# EAGLE board Qwiic Mux-Panel_v10-Panel (EAGLE 7.7.0), part 1 of 3
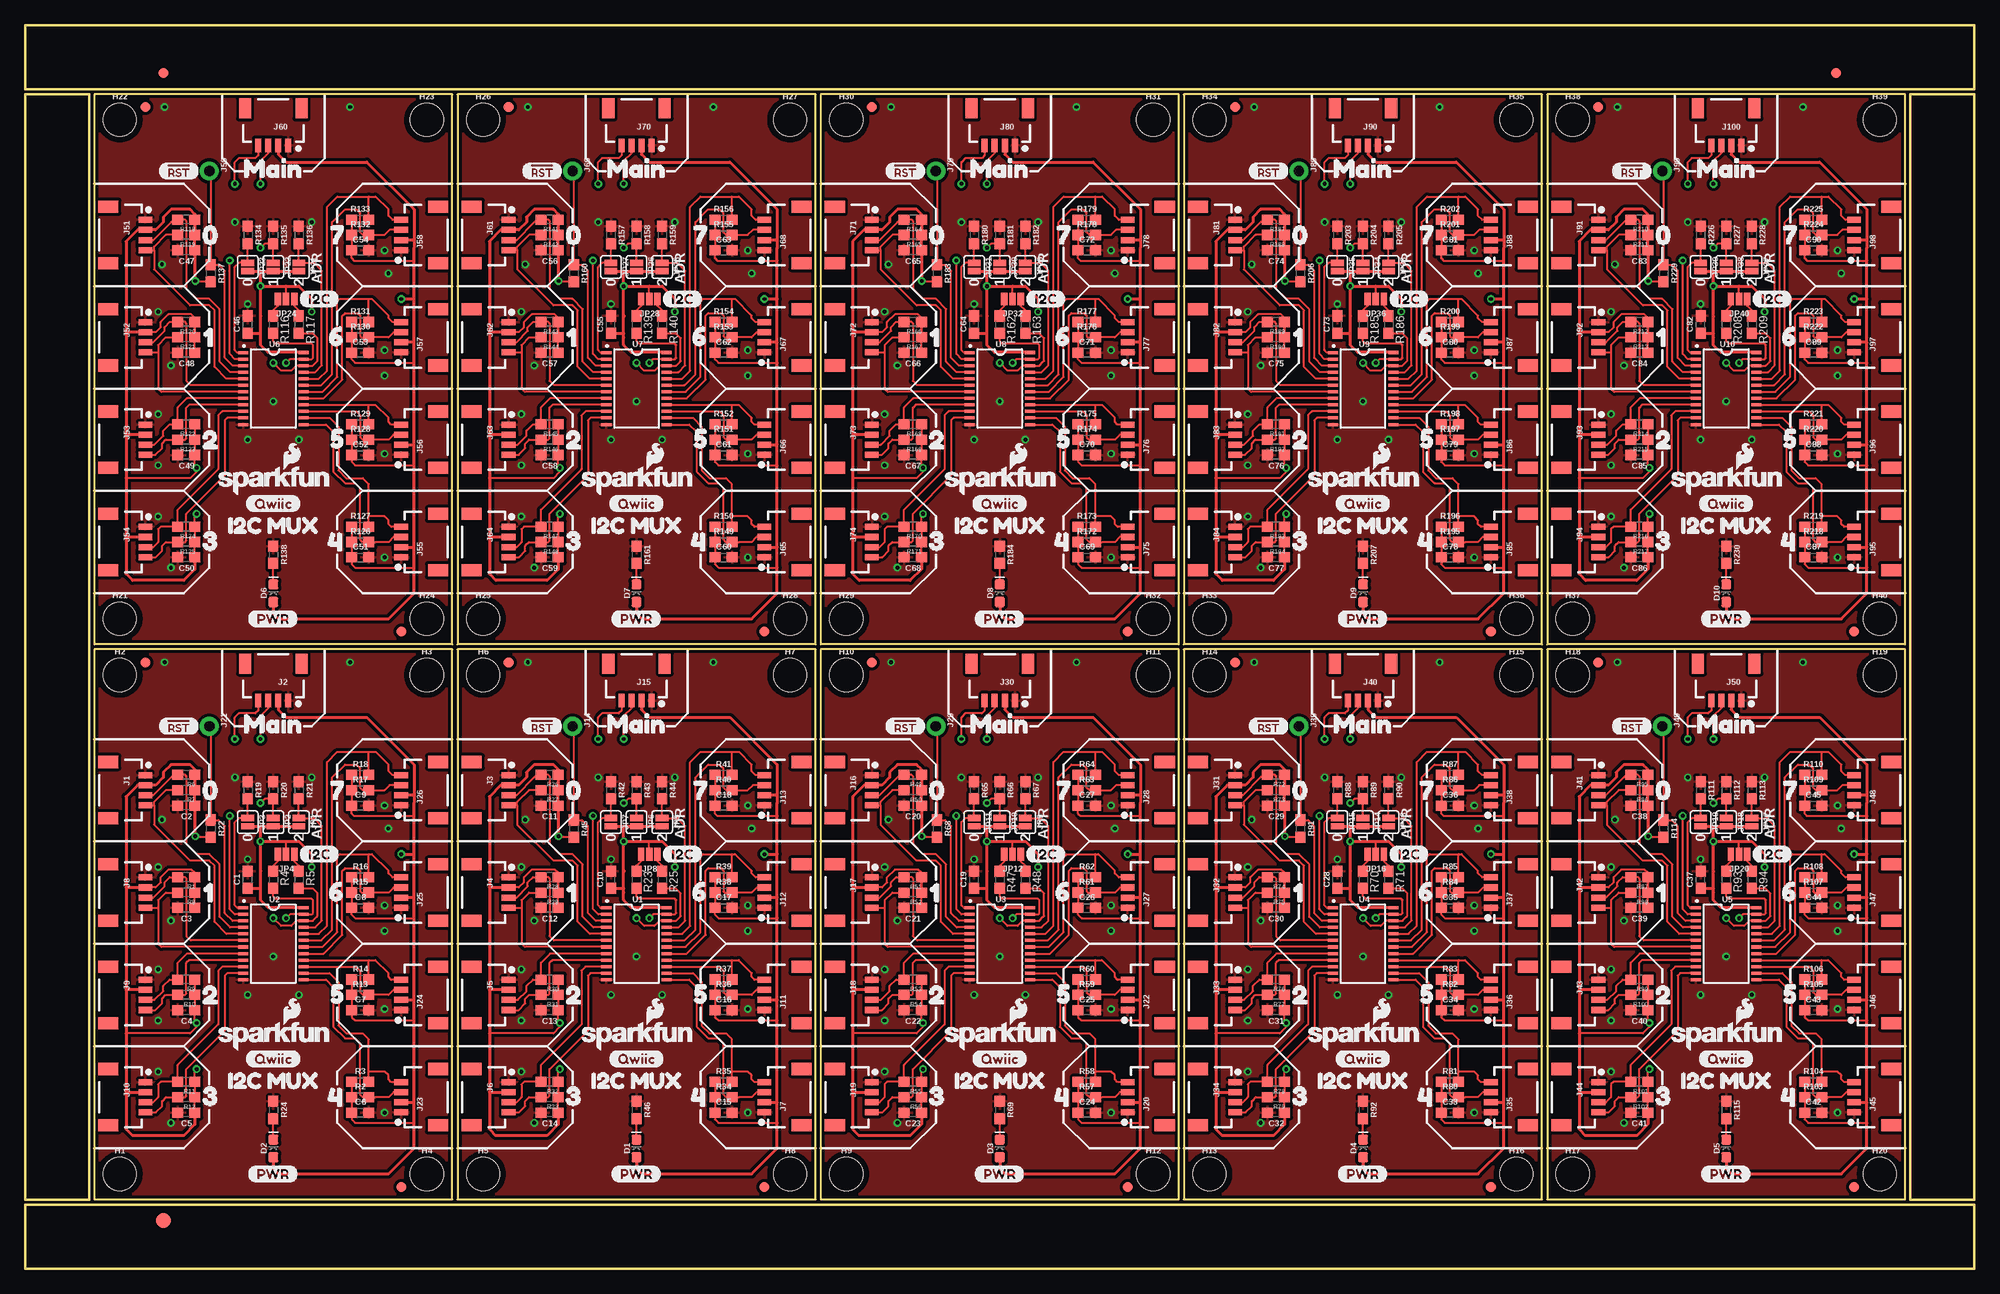
[diagram p0: board, top side]
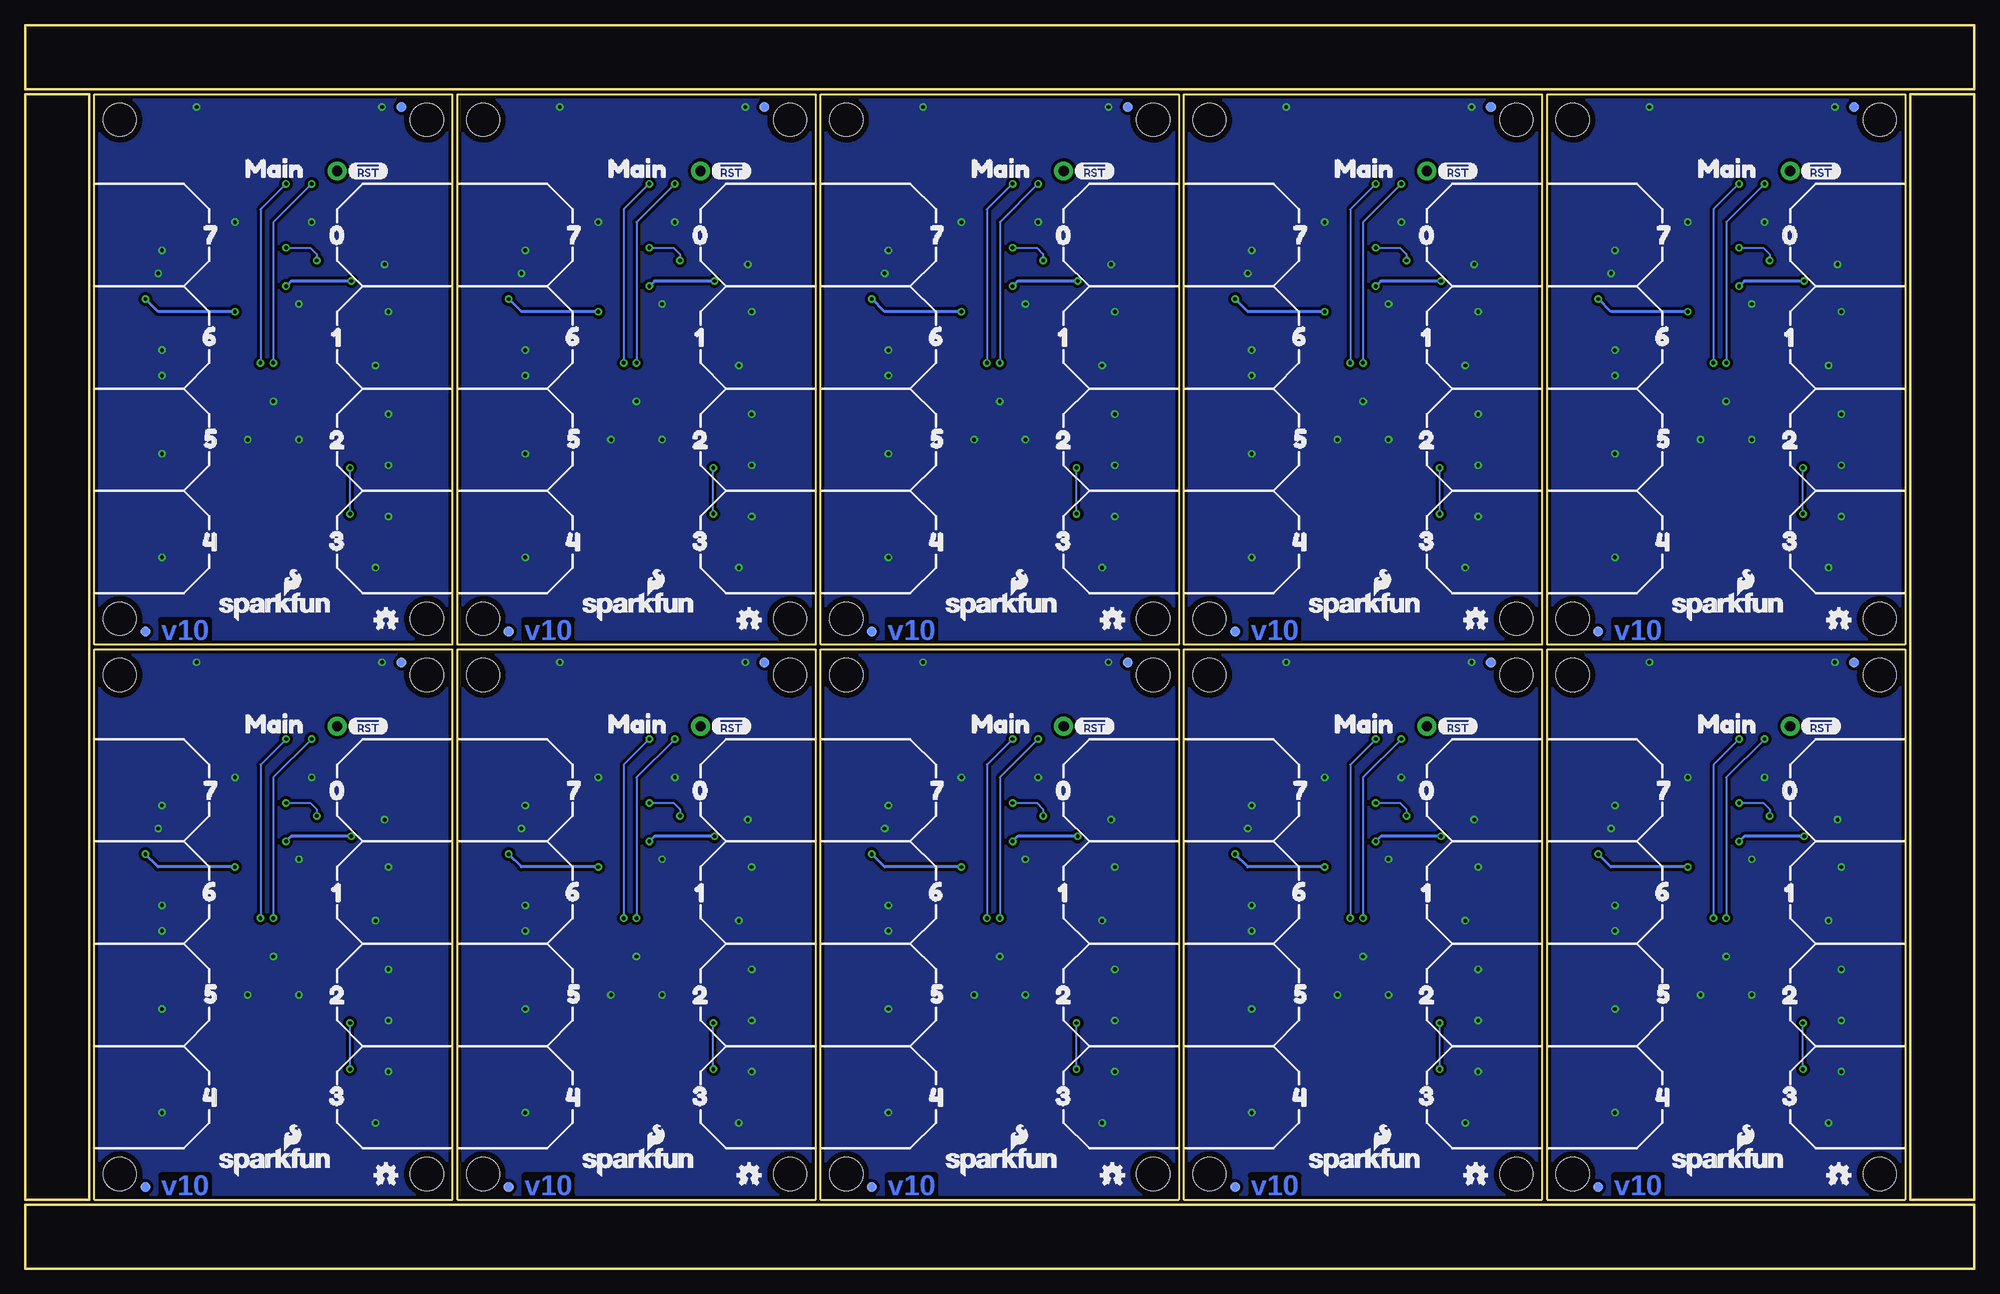
[diagram p1: board, bottom side, seen from below]

Size 193.55 x 123.44 mm. Coordinates in mm from the lower left corner, seen from the top.
Outline: 6.86,61.47 6.86,6.86 42.42,6.86 42.42,61.47 6.86,61.47
Outline: 42.93,61.47 42.93,6.86 78.49,6.86 78.49,61.47 42.93,61.47
Outline: 78.99,61.47 78.99,6.86 114.55,6.86 114.55,61.47 78.99,61.47
Outline: 115.06,61.47 115.06,6.86 150.62,6.86 150.62,61.47 115.06,61.47
Outline: 151.13,61.47 151.13,6.86 186.69,6.86 186.69,61.47 151.13,61.47
Outline: 6.86,116.59 6.86,61.98 42.42,61.98 42.42,116.59 6.86,116.59
Outline: 42.93,116.59 42.93,61.98 78.49,61.98 78.49,116.59 42.93,116.59
Outline: 78.99,116.59 78.99,61.98 114.55,61.98 114.55,116.59 78.99,116.59
Outline: 115.06,116.59 115.06,61.98 150.62,61.98 150.62,116.59 115.06,116.59
Outline: 151.13,116.59 151.13,61.98 186.69,61.98 186.69,116.59 151.13,116.59
Outline: 0,6.35 193.55,6.35 193.55,0 0,0 0,6.35
Outline: 187.2,116.59 193.55,116.59 193.55,6.86 187.2,6.86 187.2,116.59
Outline: 0,123.44 193.55,123.44 193.55,117.09 0,117.09 0,123.44
Outline: 0,116.59 6.35,116.59 6.35,6.86 0,6.86 0,116.59
Copper layers (1*16): Top 0.035mm / dielectric 1.5mm / Bottom 0.035mm
Design rules "SparkFun-2-layer-PCBWay-LIMIT": minimum track width 6mil, minimum drill 0.3mm, track to track 6mil, track to pad 6mil, pad to pad 6mil, via to via 6mil, smd to smd 6mil, copper to edge 6mil, drill to drill 6mil, minimum pad ring 7mil, minimum via ring 7mil, stop-mask expansion 4mil, vias tented up to drill 25mil, thermal gap 10mil
Net classes: 0 Default: width 0.178 mm; 1 vcc: width 0.178 mm

## Footprints (pad centres in the part's own frame; a part is rotated, then mirrored left to right if it is on the bottom)
0603 = smd 1.1 x 1: 1 -0.85,0; 2 0.85,0
LED-0603 = smd 1 x 1: A -0.877,0; C 0.877,0
FIDUCIAL-1X2 = smd 1 x 1: 1 0,0
FIDUCIAL-1.5X3 = smd 1.5 x 1.5: 1 0,0
STAND-OFF = hole 3.302: 0,0
1X04_1MM_RA = smd 0.6 x 1.35: 1 -1.5,0; 2 -0.5,0; 3 0.5,0; 4 1.5,0 | smd 1.2 x 2: NC1 2.8,-3.675; NC2 -2.8,-3.675
1X01_NO_SILK = drill 1.016 pad 1.88: 1 0,0
SMT-JUMPER_2_NO_SILK = smd 0.635 x 1.27: 1 -0.406,0; 2 0.406,0
SMT-JUMPER_3_2-NC_PASTE_NO-SILK = smd 0.635 x 1.27: 1 -0.813,0; 2 0,0; 3 0.813,0
TSSOP28 = smd 1 x 0.3: 1 -3,3.57; 2 -3,2.925; 3 -3,2.275; 4 -3,1.625; 5 -3,0.975; 6 -3,0.325; 7 -3,-0.325; 8 -3,-0.975; 9 -3,-1.625; 10 -3,-2.275; 11 -3,-2.925; 12 -3,-3.575; 13 3,-3.575; 14 3,-2.925; 15 3,-2.275; 16 3,-1.625; 17 3,-0.975; 18 3,-0.325; 19 3,0.325; 20 3,0.975; 21 3,1.625; 22 3,2.275; 23 3,2.925; 24 3,3.575

## Placement (x,y rotation side)
C1  0.1uF  [0603]  22.1,38.61 90 top
C2  1.0uF  [0603]  16,45.97 180 top
C3  1.0uF  [0603]  16,35.81 180 top
C4  1.0uF  [0603]  16,25.65 180 top
C5  1.0uF  [0603]  16,15.49 180 top
C6  1.0uF  [0603]  33.27,15.49 0 top
C7  1.0uF  [0603]  33.27,25.65 0 top
C8  1.0uF  [0603]  33.27,35.81 0 top
C9  1.0uF  [0603]  33.27,45.97 0 top
C10  0.1uF  [0603]  58.17,38.61 90 top
C11  1.0uF  [0603]  52.07,45.97 180 top
C12  1.0uF  [0603]  52.07,35.81 180 top
C13  1.0uF  [0603]  52.07,25.65 180 top
C14  1.0uF  [0603]  52.07,15.49 180 top
C15  1.0uF  [0603]  69.34,15.49 0 top
C16  1.0uF  [0603]  69.34,25.65 0 top
C17  1.0uF  [0603]  69.34,35.81 0 top
C18  1.0uF  [0603]  69.34,45.97 0 top
C19  0.1uF  [0603]  94.23,38.61 90 top
C20  1.0uF  [0603]  88.14,45.97 180 top
C21  1.0uF  [0603]  88.14,35.81 180 top
C22  1.0uF  [0603]  88.14,25.65 180 top
C23  1.0uF  [0603]  88.14,15.49 180 top
C24  1.0uF  [0603]  105.41,15.49 0 top
C25  1.0uF  [0603]  105.41,25.65 0 top
C26  1.0uF  [0603]  105.41,35.81 0 top
C27  1.0uF  [0603]  105.41,45.97 0 top
C28  0.1uF  [0603]  130.3,38.61 90 top
C29  1.0uF  [0603]  124.21,45.97 180 top
C30  1.0uF  [0603]  124.21,35.81 180 top
C31  1.0uF  [0603]  124.21,25.65 180 top
C32  1.0uF  [0603]  124.21,15.49 180 top
C33  1.0uF  [0603]  141.48,15.49 0 top
C34  1.0uF  [0603]  141.48,25.65 0 top
C35  1.0uF  [0603]  141.48,35.81 0 top
C36  1.0uF  [0603]  141.48,45.97 0 top
C37  0.1uF  [0603]  166.37,38.61 90 top
C38  1.0uF  [0603]  160.27,45.97 180 top
C39  1.0uF  [0603]  160.27,35.81 180 top
C40  1.0uF  [0603]  160.27,25.65 180 top
C41  1.0uF  [0603]  160.27,15.49 180 top
C42  1.0uF  [0603]  177.55,15.49 0 top
C43  1.0uF  [0603]  177.55,25.65 0 top
C44  1.0uF  [0603]  177.55,35.81 0 top
C45  1.0uF  [0603]  177.55,45.97 0 top
C46  0.1uF  [0603]  22.1,93.73 90 top
C47  1.0uF  [0603]  16,101.09 180 top
C48  1.0uF  [0603]  16,90.93 180 top
C49  1.0uF  [0603]  16,80.77 180 top
C50  1.0uF  [0603]  16,70.61 180 top
C51  1.0uF  [0603]  33.27,70.61 0 top
C52  1.0uF  [0603]  33.27,80.77 0 top
C53  1.0uF  [0603]  33.27,90.93 0 top
C54  1.0uF  [0603]  33.27,101.09 0 top
C55  0.1uF  [0603]  58.17,93.73 90 top
C56  1.0uF  [0603]  52.07,101.09 180 top
C57  1.0uF  [0603]  52.07,90.93 180 top
C58  1.0uF  [0603]  52.07,80.77 180 top
C59  1.0uF  [0603]  52.07,70.61 180 top
C60  1.0uF  [0603]  69.34,70.61 0 top
C61  1.0uF  [0603]  69.34,80.77 0 top
C62  1.0uF  [0603]  69.34,90.93 0 top
C63  1.0uF  [0603]  69.34,101.09 0 top
C64  0.1uF  [0603]  94.23,93.73 90 top
C65  1.0uF  [0603]  88.14,101.09 180 top
C66  1.0uF  [0603]  88.14,90.93 180 top
C67  1.0uF  [0603]  88.14,80.77 180 top
C68  1.0uF  [0603]  88.14,70.61 180 top
C69  1.0uF  [0603]  105.41,70.61 0 top
C70  1.0uF  [0603]  105.41,80.77 0 top
C71  1.0uF  [0603]  105.41,90.93 0 top
C72  1.0uF  [0603]  105.41,101.09 0 top
C73  0.1uF  [0603]  130.3,93.73 90 top
C74  1.0uF  [0603]  124.21,101.09 180 top
C75  1.0uF  [0603]  124.21,90.93 180 top
C76  1.0uF  [0603]  124.21,80.77 180 top
C77  1.0uF  [0603]  124.21,70.61 180 top
C78  1.0uF  [0603]  141.48,70.61 0 top
C79  1.0uF  [0603]  141.48,80.77 0 top
C80  1.0uF  [0603]  141.48,90.93 0 top
C81  1.0uF  [0603]  141.48,101.09 0 top
C82  0.1uF  [0603]  166.37,93.73 90 top
C83  1.0uF  [0603]  160.27,101.09 180 top
C84  1.0uF  [0603]  160.27,90.93 180 top
C85  1.0uF  [0603]  160.27,80.77 180 top
C86  1.0uF  [0603]  160.27,70.61 180 top
C87  1.0uF  [0603]  177.55,70.61 0 top
C88  1.0uF  [0603]  177.55,80.77 0 top
C89  1.0uF  [0603]  177.55,90.93 0 top
C90  1.0uF  [0603]  177.55,101.09 0 top
D1  RED  [LED-0603]  60.71,11.94 90 top
D2  RED  [LED-0603]  24.64,11.94 90 top
D3  RED  [LED-0603]  96.77,11.94 90 top
D4  RED  [LED-0603]  132.84,11.94 90 top
D5  RED  [LED-0603]  168.91,11.94 90 top
D6  RED  [LED-0603]  24.64,67.06 90 top
D7  RED  [LED-0603]  60.71,67.06 90 top
D8  RED  [LED-0603]  96.77,67.06 90 top
D9  RED  [LED-0603]  132.84,67.06 90 top
D10  RED  [LED-0603]  168.91,67.06 90 top
E$1  [FIDUCIAL-1X2]  13.72,118.68 0 top
E$2  [FIDUCIAL-1X2]  179.83,118.68 0 top
E$3  [FIDUCIAL-1.5X3]  13.72,4.76 0 top
FD1  FIDUCIAL1X2  [FIDUCIAL-1X2]  11.94,60.2 180 top
FD2  FIDUCIAL1X2  [FIDUCIAL-1X2]  37.34,8.13 180 top
FD3  FIDUCIAL1X2  [FIDUCIAL-1X2]  37.34,8.13 0 bottom
FD4  FIDUCIAL1X2  [FIDUCIAL-1X2]  11.94,60.2 0 bottom
FD5  FIDUCIAL1X2  [FIDUCIAL-1X2]  48.01,60.2 180 top
FD6  FIDUCIAL1X2  [FIDUCIAL-1X2]  73.41,8.13 180 top
FD7  FIDUCIAL1X2  [FIDUCIAL-1X2]  73.41,8.13 0 bottom
FD8  FIDUCIAL1X2  [FIDUCIAL-1X2]  48.01,60.2 0 bottom
FD9  FIDUCIAL1X2  [FIDUCIAL-1X2]  84.07,60.2 180 top
FD10  FIDUCIAL1X2  [FIDUCIAL-1X2]  109.47,8.13 180 top
FD11  FIDUCIAL1X2  [FIDUCIAL-1X2]  109.47,8.13 0 bottom
FD12  FIDUCIAL1X2  [FIDUCIAL-1X2]  84.07,60.2 0 bottom
FD13  FIDUCIAL1X2  [FIDUCIAL-1X2]  120.14,60.2 180 top
FD14  FIDUCIAL1X2  [FIDUCIAL-1X2]  145.54,8.13 180 top
FD15  FIDUCIAL1X2  [FIDUCIAL-1X2]  145.54,8.13 0 bottom
FD16  FIDUCIAL1X2  [FIDUCIAL-1X2]  120.14,60.2 0 bottom
FD17  FIDUCIAL1X2  [FIDUCIAL-1X2]  156.21,60.2 180 top
FD18  FIDUCIAL1X2  [FIDUCIAL-1X2]  181.61,8.13 180 top
FD19  FIDUCIAL1X2  [FIDUCIAL-1X2]  181.61,8.13 0 bottom
FD20  FIDUCIAL1X2  [FIDUCIAL-1X2]  156.21,60.2 0 bottom
FD21  FIDUCIAL1X2  [FIDUCIAL-1X2]  11.94,115.32 180 top
FD22  FIDUCIAL1X2  [FIDUCIAL-1X2]  37.34,63.25 180 top
FD23  FIDUCIAL1X2  [FIDUCIAL-1X2]  37.34,63.25 0 bottom
FD24  FIDUCIAL1X2  [FIDUCIAL-1X2]  11.94,115.32 0 bottom
FD25  FIDUCIAL1X2  [FIDUCIAL-1X2]  48.01,115.32 180 top
FD26  FIDUCIAL1X2  [FIDUCIAL-1X2]  73.41,63.25 180 top
FD27  FIDUCIAL1X2  [FIDUCIAL-1X2]  73.41,63.25 0 bottom
FD28  FIDUCIAL1X2  [FIDUCIAL-1X2]  48.01,115.32 0 bottom
FD29  FIDUCIAL1X2  [FIDUCIAL-1X2]  84.07,115.32 180 top
FD30  FIDUCIAL1X2  [FIDUCIAL-1X2]  109.47,63.25 180 top
FD31  FIDUCIAL1X2  [FIDUCIAL-1X2]  109.47,63.25 0 bottom
FD32  FIDUCIAL1X2  [FIDUCIAL-1X2]  84.07,115.32 0 bottom
FD33  FIDUCIAL1X2  [FIDUCIAL-1X2]  120.14,115.32 180 top
FD34  FIDUCIAL1X2  [FIDUCIAL-1X2]  145.54,63.25 180 top
FD35  FIDUCIAL1X2  [FIDUCIAL-1X2]  145.54,63.25 0 bottom
FD36  FIDUCIAL1X2  [FIDUCIAL-1X2]  120.14,115.32 0 bottom
FD37  FIDUCIAL1X2  [FIDUCIAL-1X2]  156.21,115.32 180 top
FD38  FIDUCIAL1X2  [FIDUCIAL-1X2]  181.61,63.25 180 top
FD39  FIDUCIAL1X2  [FIDUCIAL-1X2]  181.61,63.25 0 bottom
FD40  FIDUCIAL1X2  [FIDUCIAL-1X2]  156.21,115.32 0 bottom
H1  STAND-OFF  [STAND-OFF]  9.4,9.4 0 top
H2  STAND-OFF  [STAND-OFF]  9.4,58.93 0 top
H3  STAND-OFF  [STAND-OFF]  39.88,58.93 0 top
H4  STAND-OFF  [STAND-OFF]  39.88,9.4 0 top
H5  STAND-OFF  [STAND-OFF]  45.47,9.4 0 top
H6  STAND-OFF  [STAND-OFF]  45.47,58.93 0 top
H7  STAND-OFF  [STAND-OFF]  75.95,58.93 0 top
H8  STAND-OFF  [STAND-OFF]  75.95,9.4 0 top
H9  STAND-OFF  [STAND-OFF]  81.53,9.4 0 top
H10  STAND-OFF  [STAND-OFF]  81.53,58.93 0 top
H11  STAND-OFF  [STAND-OFF]  112.01,58.93 0 top
H12  STAND-OFF  [STAND-OFF]  112.01,9.4 0 top
H13  STAND-OFF  [STAND-OFF]  117.6,9.4 0 top
H14  STAND-OFF  [STAND-OFF]  117.6,58.93 0 top
H15  STAND-OFF  [STAND-OFF]  148.08,58.93 0 top
H16  STAND-OFF  [STAND-OFF]  148.08,9.4 0 top
H17  STAND-OFF  [STAND-OFF]  153.67,9.4 0 top
H18  STAND-OFF  [STAND-OFF]  153.67,58.93 0 top
H19  STAND-OFF  [STAND-OFF]  184.15,58.93 0 top
H20  STAND-OFF  [STAND-OFF]  184.15,9.4 0 top
H21  STAND-OFF  [STAND-OFF]  9.4,64.52 0 top
H22  STAND-OFF  [STAND-OFF]  9.4,114.05 0 top
H23  STAND-OFF  [STAND-OFF]  39.88,114.05 0 top
H24  STAND-OFF  [STAND-OFF]  39.88,64.52 0 top
H25  STAND-OFF  [STAND-OFF]  45.47,64.52 0 top
H26  STAND-OFF  [STAND-OFF]  45.47,114.05 0 top
H27  STAND-OFF  [STAND-OFF]  75.95,114.05 0 top
H28  STAND-OFF  [STAND-OFF]  75.95,64.52 0 top
H29  STAND-OFF  [STAND-OFF]  81.53,64.52 0 top
H30  STAND-OFF  [STAND-OFF]  81.53,114.05 0 top
H31  STAND-OFF  [STAND-OFF]  112.01,114.05 0 top
H32  STAND-OFF  [STAND-OFF]  112.01,64.52 0 top
H33  STAND-OFF  [STAND-OFF]  117.6,64.52 0 top
H34  STAND-OFF  [STAND-OFF]  117.6,114.05 0 top
H35  STAND-OFF  [STAND-OFF]  148.08,114.05 0 top
H36  STAND-OFF  [STAND-OFF]  148.08,64.52 0 top
H37  STAND-OFF  [STAND-OFF]  153.67,64.52 0 top
H38  STAND-OFF  [STAND-OFF]  153.67,114.05 0 top
H39  STAND-OFF  [STAND-OFF]  184.15,114.05 0 top
H40  STAND-OFF  [STAND-OFF]  184.15,64.52 0 top
J1  [1X04_1MM_RA]  11.94,47.5 270 top
J2  SMD  [1X04_1MM_RA]  24.64,56.39 180 top
J3  [1X04_1MM_RA]  48.01,47.5 270 top
J4  [1X04_1MM_RA]  48.01,37.34 270 top
J5  [1X04_1MM_RA]  48.01,27.18 270 top
J6  [1X04_1MM_RA]  48.01,17.02 270 top
J7  [1X04_1MM_RA]  73.41,17.02 90 top
J8  [1X04_1MM_RA]  11.94,37.34 270 top
J9  [1X04_1MM_RA]  11.94,27.18 270 top
J10  [1X04_1MM_RA]  11.94,17.02 270 top
J11  [1X04_1MM_RA]  73.41,27.18 90 top
J12  [1X04_1MM_RA]  73.41,37.34 90 top
J13  [1X04_1MM_RA]  73.41,47.5 90 top
J14  [1X01_NO_SILK]  54.36,53.85 270 top
J15  SMD  [1X04_1MM_RA]  60.71,56.39 180 top
J16  [1X04_1MM_RA]  84.07,47.5 270 top
J17  [1X04_1MM_RA]  84.07,37.34 270 top
J18  [1X04_1MM_RA]  84.07,27.18 270 top
J19  [1X04_1MM_RA]  84.07,17.02 270 top
J20  [1X04_1MM_RA]  109.47,17.02 90 top
J21  [1X01_NO_SILK]  18.29,53.85 270 top
J22  [1X04_1MM_RA]  109.47,27.18 90 top
J23  [1X04_1MM_RA]  37.34,17.02 90 top
J24  [1X04_1MM_RA]  37.34,27.18 90 top
J25  [1X04_1MM_RA]  37.34,37.34 90 top
J26  [1X04_1MM_RA]  37.34,47.5 90 top
J27  [1X04_1MM_RA]  109.47,37.34 90 top
J28  [1X04_1MM_RA]  109.47,47.5 90 top
J29  [1X01_NO_SILK]  90.42,53.85 270 top
J30  SMD  [1X04_1MM_RA]  96.77,56.39 180 top
J31  [1X04_1MM_RA]  120.14,47.5 270 top
J32  [1X04_1MM_RA]  120.14,37.34 270 top
J33  [1X04_1MM_RA]  120.14,27.18 270 top
J34  [1X04_1MM_RA]  120.14,17.02 270 top
J35  [1X04_1MM_RA]  145.54,17.02 90 top
J36  [1X04_1MM_RA]  145.54,27.18 90 top
J37  [1X04_1MM_RA]  145.54,37.34 90 top
J38  [1X04_1MM_RA]  145.54,47.5 90 top
J39  [1X01_NO_SILK]  126.49,53.85 270 top
J40  SMD  [1X04_1MM_RA]  132.84,56.39 180 top
J41  [1X04_1MM_RA]  156.21,47.5 270 top
J42  [1X04_1MM_RA]  156.21,37.34 270 top
J43  [1X04_1MM_RA]  156.21,27.18 270 top
J44  [1X04_1MM_RA]  156.21,17.02 270 top
J45  [1X04_1MM_RA]  181.61,17.02 90 top
J46  [1X04_1MM_RA]  181.61,27.18 90 top
J47  [1X04_1MM_RA]  181.61,37.34 90 top
J48  [1X04_1MM_RA]  181.61,47.5 90 top
J49  [1X01_NO_SILK]  162.56,53.85 270 top
J50  SMD  [1X04_1MM_RA]  168.91,56.39 180 top
J51  [1X04_1MM_RA]  11.94,102.62 270 top
J52  [1X04_1MM_RA]  11.94,92.46 270 top
J53  [1X04_1MM_RA]  11.94,82.3 270 top
J54  [1X04_1MM_RA]  11.94,72.14 270 top
J55  [1X04_1MM_RA]  37.34,72.14 90 top
J56  [1X04_1MM_RA]  37.34,82.3 90 top
J57  [1X04_1MM_RA]  37.34,92.46 90 top
J58  [1X04_1MM_RA]  37.34,102.62 90 top
J59  [1X01_NO_SILK]  18.29,108.97 270 top
J60  SMD  [1X04_1MM_RA]  24.64,111.51 180 top
J61  [1X04_1MM_RA]  48.01,102.62 270 top
J62  [1X04_1MM_RA]  48.01,92.46 270 top
J63  [1X04_1MM_RA]  48.01,82.3 270 top
J64  [1X04_1MM_RA]  48.01,72.14 270 top
J65  [1X04_1MM_RA]  73.41,72.14 90 top
J66  [1X04_1MM_RA]  73.41,82.3 90 top
J67  [1X04_1MM_RA]  73.41,92.46 90 top
J68  [1X04_1MM_RA]  73.41,102.62 90 top
J69  [1X01_NO_SILK]  54.36,108.97 270 top
J70  SMD  [1X04_1MM_RA]  60.71,111.51 180 top
J71  [1X04_1MM_RA]  84.07,102.62 270 top
J72  [1X04_1MM_RA]  84.07,92.46 270 top
J73  [1X04_1MM_RA]  84.07,82.3 270 top
J74  [1X04_1MM_RA]  84.07,72.14 270 top
J75  [1X04_1MM_RA]  109.47,72.14 90 top
J76  [1X04_1MM_RA]  109.47,82.3 90 top
J77  [1X04_1MM_RA]  109.47,92.46 90 top
J78  [1X04_1MM_RA]  109.47,102.62 90 top
J79  [1X01_NO_SILK]  90.42,108.97 270 top
J80  SMD  [1X04_1MM_RA]  96.77,111.51 180 top
J81  [1X04_1MM_RA]  120.14,102.62 270 top
J82  [1X04_1MM_RA]  120.14,92.46 270 top
J83  [1X04_1MM_RA]  120.14,82.3 270 top
J84  [1X04_1MM_RA]  120.14,72.14 270 top
J85  [1X04_1MM_RA]  145.54,72.14 90 top
J86  [1X04_1MM_RA]  145.54,82.3 90 top
J87  [1X04_1MM_RA]  145.54,92.46 90 top
J88  [1X04_1MM_RA]  145.54,102.62 90 top
J89  [1X01_NO_SILK]  126.49,108.97 270 top
J90  SMD  [1X04_1MM_RA]  132.84,111.51 180 top
J91  [1X04_1MM_RA]  156.21,102.62 270 top
J92  [1X04_1MM_RA]  156.21,92.46 270 top
J93  [1X04_1MM_RA]  156.21,82.3 270 top
J94  [1X04_1MM_RA]  156.21,72.14 270 top
J95  [1X04_1MM_RA]  181.61,72.14 90 top
J96  [1X04_1MM_RA]  181.61,82.3 90 top
J97  [1X04_1MM_RA]  181.61,92.46 90 top
J98  [1X04_1MM_RA]  181.61,102.62 90 top
J99  [1X01_NO_SILK]  162.56,108.97 270 top
J100  SMD  [1X04_1MM_RA]  168.91,111.51 180 top
JP1  [SMT-JUMPER_2_NO_SILK]  27.18,44.32 270 top
JP2  [SMT-JUMPER_2_NO_SILK]  24.64,44.32 270 top
JP3  [SMT-JUMPER_2_NO_SILK]  22.1,44.32 270 top
JP4  JUMPER-SMT_3_2-NC_PASTE_NO-SILK  [SMT-JUMPER_3_2-NC_PASTE_NO-SILK]  25.91,41.15 180 top
JP5  [SMT-JUMPER_2_NO_SILK]  63.25,44.32 270 top
JP6  [SMT-JUMPER_2_NO_SILK]  60.71,44.32 270 top
JP7  [SMT-JUMPER_2_NO_SILK]  58.17,44.32 270 top
JP8  JUMPER-SMT_3_2-NC_PASTE_NO-SILK  [SMT-JUMPER_3_2-NC_PASTE_NO-SILK]  61.98,41.15 180 top
JP9  [SMT-JUMPER_2_NO_SILK]  99.31,44.32 270 top
JP10  [SMT-JUMPER_2_NO_SILK]  96.77,44.32 270 top
JP11  [SMT-JUMPER_2_NO_SILK]  94.23,44.32 270 top
JP12  JUMPER-SMT_3_2-NC_PASTE_NO-SILK  [SMT-JUMPER_3_2-NC_PASTE_NO-SILK]  98.04,41.15 180 top
JP13  [SMT-JUMPER_2_NO_SILK]  135.38,44.32 270 top
JP14  [SMT-JUMPER_2_NO_SILK]  132.84,44.32 270 top
JP15  [SMT-JUMPER_2_NO_SILK]  130.3,44.32 270 top
JP16  JUMPER-SMT_3_2-NC_PASTE_NO-SILK  [SMT-JUMPER_3_2-NC_PASTE_NO-SILK]  134.11,41.15 180 top
JP17  [SMT-JUMPER_2_NO_SILK]  171.45,44.32 270 top
JP18  [SMT-JUMPER_2_NO_SILK]  168.91,44.32 270 top
JP19  [SMT-JUMPER_2_NO_SILK]  166.37,44.32 270 top
JP20  JUMPER-SMT_3_2-NC_PASTE_NO-SILK  [SMT-JUMPER_3_2-NC_PASTE_NO-SILK]  170.18,41.15 180 top
JP21  [SMT-JUMPER_2_NO_SILK]  27.18,99.44 270 top
JP22  [SMT-JUMPER_2_NO_SILK]  24.64,99.44 270 top
JP23  [SMT-JUMPER_2_NO_SILK]  22.1,99.44 270 top
JP24  JUMPER-SMT_3_2-NC_PASTE_NO-SILK  [SMT-JUMPER_3_2-NC_PASTE_NO-SILK]  25.91,96.27 180 top
JP25  [SMT-JUMPER_2_NO_SILK]  63.25,99.44 270 top
JP26  [SMT-JUMPER_2_NO_SILK]  60.71,99.44 270 top
JP27  [SMT-JUMPER_2_NO_SILK]  58.17,99.44 270 top
JP28  JUMPER-SMT_3_2-NC_PASTE_NO-SILK  [SMT-JUMPER_3_2-NC_PASTE_NO-SILK]  61.98,96.27 180 top
JP29  [SMT-JUMPER_2_NO_SILK]  99.31,99.44 270 top
JP30  [SMT-JUMPER_2_NO_SILK]  96.77,99.44 270 top
JP31  [SMT-JUMPER_2_NO_SILK]  94.23,99.44 270 top
JP32  JUMPER-SMT_3_2-NC_PASTE_NO-SILK  [SMT-JUMPER_3_2-NC_PASTE_NO-SILK]  98.04,96.27 180 top
JP33  [SMT-JUMPER_2_NO_SILK]  135.38,99.44 270 top
JP34  [SMT-JUMPER_2_NO_SILK]  132.84,99.44 270 top
JP35  [SMT-JUMPER_2_NO_SILK]  130.3,99.44 270 top
JP36  JUMPER-SMT_3_2-NC_PASTE_NO-SILK  [SMT-JUMPER_3_2-NC_PASTE_NO-SILK]  134.11,96.27 180 top
JP37  [SMT-JUMPER_2_NO_SILK]  171.45,99.44 270 top
JP38  [SMT-JUMPER_2_NO_SILK]  168.91,99.44 270 top
JP39  [SMT-JUMPER_2_NO_SILK]  166.37,99.44 270 top
JP40  JUMPER-SMT_3_2-NC_PASTE_NO-SILK  [SMT-JUMPER_3_2-NC_PASTE_NO-SILK]  170.18,96.27 180 top
LOGO1  OSHW-LOGOMINI  [OSHW-LOGO-MINI]  13.46,9.29 0 bottom
LOGO2  OSHW-LOGOMINI  [OSHW-LOGO-MINI]  49.53,9.29 0 bottom
LOGO3  OSHW-LOGOMINI  [OSHW-LOGO-MINI]  85.59,9.29 0 bottom
LOGO4  OSHW-LOGOMINI  [OSHW-LOGO-MINI]  121.66,9.29 0 bottom
LOGO5  OSHW-LOGOMINI  [OSHW-LOGO-MINI]  157.73,9.29 0 bottom
LOGO6  OSHW-LOGOMINI  [OSHW-LOGO-MINI]  13.46,64.41 0 bottom
LOGO7  OSHW-LOGOMINI  [OSHW-LOGO-MINI]  49.53,64.41 0 bottom
LOGO8  OSHW-LOGOMINI  [OSHW-LOGO-MINI]  85.59,64.41 0 bottom
LOGO9  OSHW-LOGOMINI  [OSHW-LOGO-MINI]  121.66,64.41 0 bottom
LOGO10  OSHW-LOGOMINI  [OSHW-LOGO-MINI]  157.73,64.41 0 bottom
R1  4.7k  [0603]  16,38.86 180 top
R2  4.7k  [0603]  33.27,17.02 0 top
R3  4.7k  [0603]  33.27,18.54 0 top
R4  4.7k  [0603]  24.64,38.61 270 top
R5  4.7k  [0603]  27.18,38.61 270 top
R6  4.7k  [0603]  16,49.02 180 top
R7  4.7k  [0603]  16,47.5 180 top
R8  4.7k  [0603]  16,37.34 180 top
R9  4.7k  [0603]  16,28.7 180 top
R10  4.7k  [0603]  16,27.18 180 top
R11  4.7k  [0603]  16,18.54 180 top
R12  4.7k  [0603]  16,17.02 180 top
R13  4.7k  [0603]  33.27,27.18 0 top
R14  4.7k  [0603]  33.27,28.7 0 top
R15  4.7k  [0603]  33.27,37.34 0 top
R16  4.7k  [0603]  33.27,38.86 0 top
R17  4.7k  [0603]  33.27,47.5 0 top
R18  4.7k  [0603]  33.27,49.02 0 top
R19  10k  [0603]  22.1,47.5 270 top
R20  10k  [0603]  24.64,47.5 270 top
R21  10k  [0603]  27.18,47.5 270 top
R22  10k  [0603]  18.42,43.69 270 top
R23  4.7k  [0603]  60.71,38.61 270 top
R24  1k  [0603]  24.64,15.75 270 top
R25  4.7k  [0603]  63.25,38.61 270 top
R26  4.7k  [0603]  52.07,49.02 180 top
R27  4.7k  [0603]  52.07,47.5 180 top
R28  4.7k  [0603]  52.07,38.86 180 top
R29  4.7k  [0603]  52.07,37.34 180 top
R30  4.7k  [0603]  52.07,28.7 180 top
R31  4.7k  [0603]  52.07,27.18 180 top
R32  4.7k  [0603]  52.07,18.54 180 top
R33  4.7k  [0603]  52.07,17.02 180 top
R34  4.7k  [0603]  69.34,17.02 0 top
R35  4.7k  [0603]  69.34,18.54 0 top
R36  4.7k  [0603]  69.34,27.18 0 top
R37  4.7k  [0603]  69.34,28.7 0 top
R38  4.7k  [0603]  69.34,37.34 0 top
R39  4.7k  [0603]  69.34,38.86 0 top
R40  4.7k  [0603]  69.34,47.5 0 top
R41  4.7k  [0603]  69.34,49.02 0 top
R42  10k  [0603]  58.17,47.5 270 top
R43  10k  [0603]  60.71,47.5 270 top
R44  10k  [0603]  63.25,47.5 270 top
R45  10k  [0603]  54.48,43.69 270 top
R46  1k  [0603]  60.71,15.75 270 top
R47  4.7k  [0603]  96.77,38.61 270 top
R48  4.7k  [0603]  99.31,38.61 270 top
R49  4.7k  [0603]  88.14,49.02 180 top
R50  4.7k  [0603]  88.14,47.5 180 top
R51  4.7k  [0603]  88.14,38.86 180 top
R52  4.7k  [0603]  88.14,37.34 180 top
R53  4.7k  [0603]  88.14,28.7 180 top
R54  4.7k  [0603]  88.14,27.18 180 top
R55  4.7k  [0603]  88.14,18.54 180 top
R56  4.7k  [0603]  88.14,17.02 180 top
R57  4.7k  [0603]  105.41,17.02 0 top
R58  4.7k  [0603]  105.41,18.54 0 top
R59  4.7k  [0603]  105.41,27.18 0 top
R60  4.7k  [0603]  105.41,28.7 0 top
R61  4.7k  [0603]  105.41,37.34 0 top
R62  4.7k  [0603]  105.41,38.86 0 top
R63  4.7k  [0603]  105.41,47.5 0 top
R64  4.7k  [0603]  105.41,49.02 0 top
R65  10k  [0603]  94.23,47.5 270 top
R66  10k  [0603]  96.77,47.5 270 top
R67  10k  [0603]  99.31,47.5 270 top
R68  10k  [0603]  90.55,43.69 270 top
R69  1k  [0603]  96.77,15.75 270 top
R70  4.7k  [0603]  132.84,38.61 270 top
R71  4.7k  [0603]  135.38,38.61 270 top
R72  4.7k  [0603]  124.21,49.02 180 top
R73  4.7k  [0603]  124.21,47.5 180 top
R74  4.7k  [0603]  124.21,38.86 180 top
R75  4.7k  [0603]  124.21,37.34 180 top
R76  4.7k  [0603]  124.21,28.7 180 top
R77  4.7k  [0603]  124.21,27.18 180 top
R78  4.7k  [0603]  124.21,18.54 180 top
R79  4.7k  [0603]  124.21,17.02 180 top
R80  4.7k  [0603]  141.48,17.02 0 top
R81  4.7k  [0603]  141.48,18.54 0 top
R82  4.7k  [0603]  141.48,27.18 0 top
R83  4.7k  [0603]  141.48,28.7 0 top
R84  4.7k  [0603]  141.48,37.34 0 top
R85  4.7k  [0603]  141.48,38.86 0 top
R86  4.7k  [0603]  141.48,47.5 0 top
R87  4.7k  [0603]  141.48,49.02 0 top
R88  10k  [0603]  130.3,47.5 270 top
R89  10k  [0603]  132.84,47.5 270 top
R90  10k  [0603]  135.38,47.5 270 top
R91  10k  [0603]  126.62,43.69 270 top
R92  1k  [0603]  132.84,15.75 270 top
R93  4.7k  [0603]  168.91,38.61 270 top
R94  4.7k  [0603]  171.45,38.61 270 top
R95  4.7k  [0603]  160.27,49.02 180 top
R96  4.7k  [0603]  160.27,47.5 180 top
R97  4.7k  [0603]  160.27,38.86 180 top
R98  4.7k  [0603]  160.27,37.34 180 top
R99  4.7k  [0603]  160.27,28.7 180 top
R100  4.7k  [0603]  160.27,27.18 180 top
R101  4.7k  [0603]  160.27,18.54 180 top
R102  4.7k  [0603]  160.27,17.02 180 top
R103  4.7k  [0603]  177.55,17.02 0 top
R104  4.7k  [0603]  177.55,18.54 0 top
R105  4.7k  [0603]  177.55,27.18 0 top
R106  4.7k  [0603]  177.55,28.7 0 top
R107  4.7k  [0603]  177.55,37.34 0 top
R108  4.7k  [0603]  177.55,38.86 0 top
R109  4.7k  [0603]  177.55,47.5 0 top
R110  4.7k  [0603]  177.55,49.02 0 top
R111  10k  [0603]  166.37,47.5 270 top
R112  10k  [0603]  168.91,47.5 270 top
R113  10k  [0603]  171.45,47.5 270 top
R114  10k  [0603]  162.69,43.69 270 top
R115  1k  [0603]  168.91,15.75 270 top
R116  4.7k  [0603]  24.64,93.73 270 top
R117  4.7k  [0603]  27.18,93.73 270 top
R118  4.7k  [0603]  16,104.14 180 top
R119  4.7k  [0603]  16,102.62 180 top
R120  4.7k  [0603]  16,93.98 180 top
R121  4.7k  [0603]  16,92.46 180 top
R122  4.7k  [0603]  16,83.82 180 top
R123  4.7k  [0603]  16,82.3 180 top
R124  4.7k  [0603]  16,73.66 180 top
R125  4.7k  [0603]  16,72.14 180 top
R126  4.7k  [0603]  33.27,72.14 0 top
R127  4.7k  [0603]  33.27,73.66 0 top
R128  4.7k  [0603]  33.27,82.3 0 top
R129  4.7k  [0603]  33.27,83.82 0 top
R130  4.7k  [0603]  33.27,92.46 0 top
R131  4.7k  [0603]  33.27,93.98 0 top
R132  4.7k  [0603]  33.27,102.62 0 top
R133  4.7k  [0603]  33.27,104.14 0 top
R134  10k  [0603]  22.1,102.62 270 top
R135  10k  [0603]  24.64,102.62 270 top
R136  10k  [0603]  27.18,102.62 270 top
R137  10k  [0603]  18.42,98.81 270 top
R138  1k  [0603]  24.64,70.87 270 top
R139  4.7k  [0603]  60.71,93.73 270 top
R140  4.7k  [0603]  63.25,93.73 270 top
R141  4.7k  [0603]  52.07,104.14 180 top
R142  4.7k  [0603]  52.07,102.62 180 top
R143  4.7k  [0603]  52.07,93.98 180 top
R144  4.7k  [0603]  52.07,92.46 180 top
R145  4.7k  [0603]  52.07,83.82 180 top
R146  4.7k  [0603]  52.07,82.3 180 top
R147  4.7k  [0603]  52.07,73.66 180 top
R148  4.7k  [0603]  52.07,72.14 180 top
R149  4.7k  [0603]  69.34,72.14 0 top
R150  4.7k  [0603]  69.34,73.66 0 top
R151  4.7k  [0603]  69.34,82.3 0 top
R152  4.7k  [0603]  69.34,83.82 0 top
R153  4.7k  [0603]  69.34,92.46 0 top
R154  4.7k  [0603]  69.34,93.98 0 top
R155  4.7k  [0603]  69.34,102.62 0 top
R156  4.7k  [0603]  69.34,104.14 0 top
R157  10k  [0603]  58.17,102.62 270 top
R158  10k  [0603]  60.71,102.62 270 top
R159  10k  [0603]  63.25,102.62 270 top
R160  10k  [0603]  54.48,98.81 270 top
R161  1k  [0603]  60.71,70.87 270 top
R162  4.7k  [0603]  96.77,93.73 270 top
R163  4.7k  [0603]  99.31,93.73 270 top
R164  4.7k  [0603]  88.14,104.14 180 top
R165  4.7k  [0603]  88.14,102.62 180 top
R166  4.7k  [0603]  88.14,93.98 180 top
R167  4.7k  [0603]  88.14,92.46 180 top
R168  4.7k  [0603]  88.14,83.82 180 top
R169  4.7k  [0603]  88.14,82.3 180 top
R170  4.7k  [0603]  88.14,73.66 180 top
R171  4.7k  [0603]  88.14,72.14 180 top
R172  4.7k  [0603]  105.41,72.14 0 top
R173  4.7k  [0603]  105.41,73.66 0 top
R174  4.7k  [0603]  105.41,82.3 0 top
R175  4.7k  [0603]  105.41,83.82 0 top
R176  4.7k  [0603]  105.41,92.46 0 top
R177  4.7k  [0603]  105.41,93.98 0 top
R178  4.7k  [0603]  105.41,102.62 0 top
R179  4.7k  [0603]  105.41,104.14 0 top
R180  10k  [0603]  94.23,102.62 270 top
R181  10k  [0603]  96.77,102.62 270 top
R182  10k  [0603]  99.31,102.62 270 top
R183  10k  [0603]  90.55,98.81 270 top
R184  1k  [0603]  96.77,70.87 270 top
R185  4.7k  [0603]  132.84,93.73 270 top
R186  4.7k  [0603]  135.38,93.73 270 top
R187  4.7k  [0603]  124.21,104.14 180 top
R188  4.7k  [0603]  124.21,102.62 180 top
R189  4.7k  [0603]  124.21,93.98 180 top
R190  4.7k  [0603]  124.21,92.46 180 top
R191  4.7k  [0603]  124.21,83.82 180 top
R192  4.7k  [0603]  124.21,82.3 180 top
R193  4.7k  [0603]  124.21,73.66 180 top
R194  4.7k  [0603]  124.21,72.14 180 top
R195  4.7k  [0603]  141.48,72.14 0 top
R196  4.7k  [0603]  141.48,73.66 0 top
R197  4.7k  [0603]  141.48,82.3 0 top
R198  4.7k  [0603]  141.48,83.82 0 top
R199  4.7k  [0603]  141.48,92.46 0 top
R200  4.7k  [0603]  141.48,93.98 0 top
R201  4.7k  [0603]  141.48,102.62 0 top
R202  4.7k  [0603]  141.48,104.14 0 top
R203  10k  [0603]  130.3,102.62 270 top
R204  10k  [0603]  132.84,102.62 270 top
R205  10k  [0603]  135.38,102.62 270 top
R206  10k  [0603]  126.62,98.81 270 top
R207  1k  [0603]  132.84,70.87 270 top
R208  4.7k  [0603]  168.91,93.73 270 top
R209  4.7k  [0603]  171.45,93.73 270 top
R210  4.7k  [0603]  160.27,104.14 180 top
R211  4.7k  [0603]  160.27,102.62 180 top
R212  4.7k  [0603]  160.27,93.98 180 top
R213  4.7k  [0603]  160.27,92.46 180 top
R214  4.7k  [0603]  160.27,83.82 180 top
R215  4.7k  [0603]  160.27,82.3 180 top
R216  4.7k  [0603]  160.27,73.66 180 top
R217  4.7k  [0603]  160.27,72.14 180 top
R218  4.7k  [0603]  177.55,72.14 0 top
R219  4.7k  [0603]  177.55,73.66 0 top
R220  4.7k  [0603]  177.55,82.3 0 top
R221  4.7k  [0603]  177.55,83.82 0 top
R222  4.7k  [0603]  177.55,92.46 0 top
R223  4.7k  [0603]  177.55,93.98 0 top
R224  4.7k  [0603]  177.55,102.62 0 top
R225  4.7k  [0603]  177.55,104.14 0 top
R226  10k  [0603]  166.37,102.62 270 top
R227  10k  [0603]  168.91,102.62 270 top
R228  10k  [0603]  171.45,102.62 270 top
R229  10k  [0603]  162.69,98.81 270 top
R230  1k  [0603]  168.91,70.87 270 top
U1  PCA9548A  [TSSOP28]  60.71,32.26 0 top
U2  PCA9548A  [TSSOP28]  24.64,32.26 0 top
U3  PCA9548A  [TSSOP28]  96.77,32.26 0 top
U4  PCA9548A  [TSSOP28]  132.84,32.26 0 top
U5  PCA9548A  [TSSOP28]  168.91,32.26 0 top
U6  PCA9548A  [TSSOP28]  24.64,87.38 0 top
U7  PCA9548A  [TSSOP28]  60.71,87.38 0 top
U8  PCA9548A  [TSSOP28]  96.77,87.38 0 top
U9  PCA9548A  [TSSOP28]  132.84,87.38 0 top
U10  PCA9548A  [TSSOP28]  168.91,87.38 0 top
U$1  SFE_LOGO_NAME_FLAME.1_INCH  [SFE_LOGO_NAME_FLAME_.1]  18.8,21.59 0 top
U$2  SFE_LOGO_NAME_FLAME.1_INCH  [SFE_LOGO_NAME_FLAME_.1]  30.4,9.08 0 bottom
U$3  [(PWR)]  22.1,9.4 0 top
U$4  [(QWIIC)]  21.84,20.83 0 top
U$5  [(I2C)]  27.18,41.15 0 top
U$6  [00]  15.75,47.5 0 top
U$7  [11]  15.75,37.34 0 top
U$8  [22]  15.75,27.18 0 top
U$9  [33]  16,17.14 0 top
U$10  [44]  28.45,17.02 0 top
U$11  [55]  28.7,27.3 0 top
U$12  [00]  20.95,47.5 0 bottom
U$13  [77]  28.7,47.5 0 top
U$14  [#RST10]  13.08,53.85 0 top
U$15  [I2C_MUX8]  18.8,18.67 0 top
U$16  [MAIN0]  20.07,54.1 0 top
U$17  [61]  28.57,37.47 0 top
U$18  [11]  20.83,37.34 0 bottom
U$19  [22]  20.95,27.18 0 bottom
U$20  [33]  20.7,17.14 0 bottom
U$21  [44]  33.27,17.02 0 bottom
U$22  [55]  33.15,27.3 0 bottom
U$23  [61]  33.27,37.47 0 bottom
U$24  [77]  33.15,47.5 0 bottom
U$25  [MAIN0]  29.08,54.1 0 bottom
U$26  [#RST10]  17.4,53.85 0 bottom
U$27  SFE_LOGO_NAME_FLAME.1_INCH  [SFE_LOGO_NAME_FLAME_.1]  54.86,21.59 0 top
U$28  SFE_LOGO_NAME_FLAME.1_INCH  [SFE_LOGO_NAME_FLAME_.1]  66.46,9.08 0 bottom
U$29  [(PWR)]  58.17,9.4 0 top
U$30  [(QWIIC)]  57.91,20.83 0 top
U$31  [(I2C)]  63.25,41.15 0 top
U$32  [00]  51.82,47.5 0 top
U$33  [44]  64.52,17.02 0 top
U$34  [55]  64.77,27.3 0 top
U$35  [77]  64.77,47.5 0 top
U$36  [#RST10]  49.15,53.85 0 top
U$37  [11]  51.82,37.34 0 top
U$38  [22]  51.82,27.18 0 top
U$39  [33]  52.07,17.14 0 top
U$40  [I2C_MUX8]  54.86,18.67 0 top
U$41  [MAIN0]  56.13,54.1 0 top
U$42  [61]  64.64,37.47 0 top
U$43  [00]  57.02,47.5 0 bottom
U$44  [11]  56.9,37.34 0 bottom
U$45  [22]  57.02,27.18 0 bottom
U$46  [33]  56.77,17.14 0 bottom
U$47  [44]  69.34,17.02 0 bottom
U$48  [55]  69.22,27.3 0 bottom
U$49  [61]  69.34,37.47 0 bottom
U$50  [77]  69.22,47.5 0 bottom
U$51  [MAIN0]  65.15,54.1 0 bottom
U$52  [#RST10]  53.47,53.85 0 bottom
U$53  SFE_LOGO_NAME_FLAME.1_INCH  [SFE_LOGO_NAME_FLAME_.1]  90.93,21.59 0 top
U$54  SFE_LOGO_NAME_FLAME.1_INCH  [SFE_LOGO_NAME_FLAME_.1]  102.53,9.08 0 bottom
U$55  [(PWR)]  94.23,9.4 0 top
U$56  [(QWIIC)]  93.98,20.83 0 top
U$57  [(I2C)]  99.31,41.15 0 top
U$58  [00]  87.88,47.5 0 top
U$59  [44]  100.58,17.02 0 top
U$60  [55]  100.84,27.3 0 top
U$61  [77]  100.84,47.5 0 top
U$62  [#RST10]  85.22,53.85 0 top
U$63  [11]  87.88,37.34 0 top
U$64  [22]  87.88,27.18 0 top
U$65  [33]  88.14,17.14 0 top
U$66  [I2C_MUX8]  90.93,18.67 0 top
U$67  [MAIN0]  92.2,54.1 0 top
U$68  [61]  100.71,37.47 0 top
U$69  [00]  93.09,47.5 0 bottom
U$70  [11]  92.96,37.34 0 bottom
U$71  [22]  93.09,27.18 0 bottom
U$72  [33]  92.84,17.14 0 bottom
U$73  [44]  105.41,17.02 0 bottom
U$74  [55]  105.28,27.3 0 bottom
U$75  [61]  105.41,37.47 0 bottom
U$76  [77]  105.28,47.5 0 bottom
U$77  [MAIN0]  101.22,54.1 0 bottom
U$78  [#RST10]  89.53,53.85 0 bottom
U$79  SFE_LOGO_NAME_FLAME.1_INCH  [SFE_LOGO_NAME_FLAME_.1]  127,21.59 0 top
U$80  SFE_LOGO_NAME_FLAME.1_INCH  [SFE_LOGO_NAME_FLAME_.1]  138.6,9.08 0 bottom
U$81  [(PWR)]  130.3,9.4 0 top
U$82  [(QWIIC)]  130.05,20.83 0 top
U$83  [(I2C)]  135.38,41.15 0 top
U$84  [00]  123.95,47.5 0 top
U$85  [44]  136.65,17.02 0 top
U$86  [55]  136.91,27.3 0 top
U$87  [77]  136.91,47.5 0 top
U$88  [#RST10]  121.28,53.85 0 top
U$89  [11]  123.95,37.34 0 top
U$90  [22]  123.95,27.18 0 top
U$91  [33]  124.21,17.14 0 top
U$92  [I2C_MUX8]  127,18.67 0 top
U$93  [MAIN0]  128.27,54.1 0 top
U$94  [61]  136.78,37.47 0 top
U$95  [00]  129.16,47.5 0 bottom
U$96  [11]  129.03,37.34 0 bottom
U$97  [22]  129.16,27.18 0 bottom
U$98  [33]  128.91,17.14 0 bottom
U$99  [44]  141.48,17.02 0 bottom
U$100  [55]  141.35,27.3 0 bottom
U$101  [61]  141.48,37.47 0 bottom
U$102  [77]  141.35,47.5 0 bottom
U$103  [MAIN0]  137.29,54.1 0 bottom
U$104  [#RST10]  125.6,53.85 0 bottom
U$105  SFE_LOGO_NAME_FLAME.1_INCH  [SFE_LOGO_NAME_FLAME_.1]  163.07,21.59 0 top
U$106  SFE_LOGO_NAME_FLAME.1_INCH  [SFE_LOGO_NAME_FLAME_.1]  174.67,9.08 0 bottom
U$107  [(PWR)]  166.37,9.4 0 top
U$108  [(QWIIC)]  166.12,20.83 0 top
U$109  [(I2C)]  171.45,41.15 0 top
U$110  [00]  160.02,47.5 0 top
U$111  [44]  172.72,17.02 0 top
U$112  [55]  172.97,27.3 0 top
U$113  [77]  172.97,47.5 0 top
U$114  [#RST10]  157.35,53.85 0 top
U$115  [11]  160.02,37.34 0 top
U$116  [22]  160.02,27.18 0 top
U$117  [33]  160.27,17.14 0 top
U$118  [I2C_MUX8]  163.07,18.67 0 top
U$119  [MAIN0]  164.34,54.1 0 top
U$120  [61]  172.85,37.47 0 top
U$121  [00]  165.23,47.5 0 bottom
U$122  [11]  165.1,37.34 0 bottom
U$123  [22]  165.23,27.18 0 bottom
U$124  [33]  164.97,17.14 0 bottom
U$125  [44]  177.55,17.02 0 bottom
U$126  [55]  177.42,27.3 0 bottom
U$127  [61]  177.55,37.47 0 bottom
U$128  [77]  177.42,47.5 0 bottom
U$129  [MAIN0]  173.35,54.1 0 bottom
U$130  [#RST10]  161.67,53.85 0 bottom
U$131  SFE_LOGO_NAME_FLAME.1_INCH  [SFE_LOGO_NAME_FLAME_.1]  18.8,76.71 0 top
U$132  SFE_LOGO_NAME_FLAME.1_INCH  [SFE_LOGO_NAME_FLAME_.1]  30.4,64.2 0 bottom
U$133  [(PWR)]  22.1,64.52 0 top
U$134  [(QWIIC)]  21.84,75.95 0 top
U$135  [(I2C)]  27.18,96.27 0 top
U$136  [00]  15.75,102.62 0 top
U$137  [44]  28.45,72.14 0 top
U$138  [55]  28.7,82.42 0 top
U$139  [77]  28.7,102.62 0 top
U$140  [#RST10]  13.08,108.97 0 top
U$141  [11]  15.75,92.46 0 top
U$142  [22]  15.75,82.3 0 top
U$143  [33]  16,72.26 0 top
U$144  [I2C_MUX8]  18.8,73.79 0 top
U$145  [MAIN0]  20.07,109.22 0 top
U$146  [61]  28.57,92.58 0 top
U$147  [00]  20.95,102.62 0 bottom
U$148  [11]  20.83,92.46 0 bottom
U$149  [22]  20.95,82.3 0 bottom
U$150  [33]  20.7,72.26 0 bottom
U$151  [44]  33.27,72.14 0 bottom
U$152  [55]  33.15,82.42 0 bottom
U$153  [61]  33.27,92.58 0 bottom
U$154  [77]  33.15,102.62 0 bottom
U$155  [MAIN0]  29.08,109.22 0 bottom
U$156  [#RST10]  17.4,108.97 0 bottom
U$157  SFE_LOGO_NAME_FLAME.1_INCH  [SFE_LOGO_NAME_FLAME_.1]  54.86,76.71 0 top
U$158  SFE_LOGO_NAME_FLAME.1_INCH  [SFE_LOGO_NAME_FLAME_.1]  66.46,64.2 0 bottom
U$159  [(PWR)]  58.17,64.52 0 top
U$160  [(QWIIC)]  57.91,75.95 0 top
U$161  [(I2C)]  63.25,96.27 0 top
U$162  [00]  51.82,102.62 0 top
U$163  [44]  64.52,72.14 0 top
U$164  [55]  64.77,82.42 0 top
U$165  [77]  64.77,102.62 0 top
U$166  [#RST10]  49.15,108.97 0 top
U$167  [11]  51.82,92.46 0 top
U$168  [22]  51.82,82.3 0 top
U$169  [33]  52.07,72.26 0 top
U$170  [I2C_MUX8]  54.86,73.79 0 top
U$171  [MAIN0]  56.13,109.22 0 top
U$172  [61]  64.64,92.58 0 top
U$173  [00]  57.02,102.62 0 bottom
U$174  [11]  56.9,92.46 0 bottom
U$175  [22]  57.02,82.3 0 bottom
U$176  [33]  56.77,72.26 0 bottom
U$177  [44]  69.34,72.14 0 bottom
U$178  [55]  69.22,82.42 0 bottom
U$179  [61]  69.34,92.58 0 bottom
U$180  [77]  69.22,102.62 0 bottom
U$181  [MAIN0]  65.15,109.22 0 bottom
U$182  [#RST10]  53.47,108.97 0 bottom
U$183  SFE_LOGO_NAME_FLAME.1_INCH  [SFE_LOGO_NAME_FLAME_.1]  90.93,76.71 0 top
U$184  SFE_LOGO_NAME_FLAME.1_INCH  [SFE_LOGO_NAME_FLAME_.1]  102.53,64.2 0 bottom
U$185  [(PWR)]  94.23,64.52 0 top
U$186  [(QWIIC)]  93.98,75.95 0 top
U$187  [(I2C)]  99.31,96.27 0 top
U$188  [00]  87.88,102.62 0 top
U$189  [44]  100.58,72.14 0 top
U$190  [55]  100.84,82.42 0 top
U$191  [77]  100.84,102.62 0 top
U$192  [#RST10]  85.22,108.97 0 top
U$193  [11]  87.88,92.46 0 top
U$194  [22]  87.88,82.3 0 top
U$195  [33]  88.14,72.26 0 top
U$196  [I2C_MUX8]  90.93,73.79 0 top
U$197  [MAIN0]  92.2,109.22 0 top
U$198  [61]  100.71,92.58 0 top
U$199  [00]  93.09,102.62 0 bottom
U$200  [11]  92.96,92.46 0 bottom
U$201  [22]  93.09,82.3 0 bottom
U$202  [33]  92.84,72.26 0 bottom
U$203  [44]  105.41,72.14 0 bottom
U$204  [55]  105.28,82.42 0 bottom
U$205  [61]  105.41,92.58 0 bottom
U$206  [77]  105.28,102.62 0 bottom
U$207  [MAIN0]  101.22,109.22 0 bottom
U$208  [#RST10]  89.53,108.97 0 bottom
U$209  SFE_LOGO_NAME_FLAME.1_INCH  [SFE_LOGO_NAME_FLAME_.1]  127,76.71 0 top
U$210  SFE_LOGO_NAME_FLAME.1_INCH  [SFE_LOGO_NAME_FLAME_.1]  138.6,64.2 0 bottom
U$211  [(PWR)]  130.3,64.52 0 top
U$212  [(QWIIC)]  130.05,75.95 0 top
U$213  [(I2C)]  135.38,96.27 0 top
U$214  [00]  123.95,102.62 0 top
U$215  [44]  136.65,72.14 0 top
U$216  [55]  136.91,82.42 0 top
U$217  [77]  136.91,102.62 0 top
U$218  [#RST10]  121.28,108.97 0 top
U$219  [11]  123.95,92.46 0 top
U$220  [22]  123.95,82.3 0 top
U$221  [33]  124.21,72.26 0 top
U$222  [I2C_MUX8]  127,73.79 0 top
U$223  [MAIN0]  128.27,109.22 0 top
U$224  [61]  136.78,92.58 0 top
U$225  [00]  129.16,102.62 0 bottom
U$226  [11]  129.03,92.46 0 bottom
U$227  [22]  129.16,82.3 0 bottom
U$228  [33]  128.91,72.26 0 bottom
U$229  [44]  141.48,72.14 0 bottom
U$230  [55]  141.35,82.42 0 bottom
U$231  [61]  141.48,92.58 0 bottom
U$232  [77]  141.35,102.62 0 bottom
U$233  [MAIN0]  137.29,109.22 0 bottom
U$234  [#RST10]  125.6,108.97 0 bottom
U$235  SFE_LOGO_NAME_FLAME.1_INCH  [SFE_LOGO_NAME_FLAME_.1]  163.07,76.71 0 top
U$236  SFE_LOGO_NAME_FLAME.1_INCH  [SFE_LOGO_NAME_FLAME_.1]  174.67,64.2 0 bottom
U$237  [(PWR)]  166.37,64.52 0 top
U$238  [(QWIIC)]  166.12,75.95 0 top
U$239  [(I2C)]  171.45,96.27 0 top
U$240  [00]  160.02,102.62 0 top
U$241  [44]  172.72,72.14 0 top
U$242  [55]  172.97,82.42 0 top
U$243  [77]  172.97,102.62 0 top
U$244  [#RST10]  157.35,108.97 0 top
U$245  [11]  160.02,92.46 0 top
U$246  [22]  160.02,82.3 0 top
U$247  [33]  160.27,72.26 0 top
U$248  [I2C_MUX8]  163.07,73.79 0 top
U$249  [MAIN0]  164.34,109.22 0 top
U$250  [61]  172.85,92.58 0 top
U$251  [00]  165.23,102.62 0 bottom
U$252  [11]  165.1,92.46 0 bottom
U$253  [22]  165.23,82.3 0 bottom
U$254  [33]  164.97,72.26 0 bottom
U$255  [44]  177.55,72.14 0 bottom
U$256  [55]  177.42,82.42 0 bottom
U$257  [61]  177.55,92.58 0 bottom
U$258  [77]  177.42,102.62 0 bottom
U$259  [MAIN0]  173.35,109.22 0 bottom
U$260  [#RST10]  161.67,108.97 0 bottom

## Library data of the parts
C1 C10 C19 C28 C37 C46 C55 C64 C73 C82 = SparkFun-Capacitors; PROD_ID: CAP-00810
C2-C9 C11-C18 C20-C27 C29-C36 C38-C45 C47-C54 C56-C63 C65-C72 C74-C81 C83-C90 = SparkFun-Capacitors; PROD_ID: CAP-00868
D1-D10 = SparkFun-LED; PROD_ID: DIO-00819
E$1 E$2 FD1-FD40 LOGO1-LOGO10 U$1 U$2 U$27 U$28 U$53 U$54 U$79 U$80 U$105 U$106 U$131 U$132 U$157 U$158 U$183 U$184 U$209 U$210 U$235 U$236 = SparkFun-Aesthetics
E$3 = SparkFun-Retired
H1-H40 = SparkFun-Hardware
J1 J3-J13 J16-J20 J22-J28 J31-J38 J41-J48 J51-J58 J61-J68 J71-J78 J81-J88 J91-J98 = SparkFun-Connectors; PROD_ID: CONN-13694
J2 J15 J30 J40 J50 J60 J70 J80 J90 J100 = SparkX
J14 J21 J29 J39 J49 J59 J69 J79 J89 J99 = SparkFun-Connectors
JP1-JP40 = SparkFun-Jumpers
R1-R18 R23 R25-R41 R47-R64 R70-R87 R93-R110 R116-R133 R139-R156 R162-R179 R185-R202 R208-R225 = SparkFun-Resistors; PROD_ID: RES-07857
R19-R22 R42-R45 R65-R68 R88-R91 R111-R114 R134-R137 R157-R160 R180-R183 R203-R206 R226-R229 = SparkFun-Resistors; PROD_ID: RES-00824
R24 R46 R69 R92 R115 R138 R161 R184 R207 R230 = SparkFun-Resistors; PROD_ID: RES-07856
U1-U10 = SparkFun-IC-Logic; PROD_ID: IC-13948
U$3-U$5 U$29-U$31 U$55-U$57 U$81-U$83 U$107-U$109 U$133-U$135 U$159-U$161 U$185-U$187 U$211-U$213 U$237-U$239 = Labels-0_04
U$6-U$15 U$18-U$22 U$24 U$26 U$32-U$40 U$43-U$48 U$50 U$52 U$58-U$66 U$69-U$74 U$76 U$78 U$84-U$92 U$95-U$100 U$102 U$104 U$110-U$118 U$121-U$126 U$128 U$130 U$136-U$144 U$147-U$152 U$154 U$156 U$162-U$170 U$173-U$178 U$180 U$182 U$188-U$196 U$199-U$204 U$206 U$208 U$214-U$222 U$225-U$230 U$232 U$234 U$240-U$248 U$251-U$256 U$258 U$260 = buzzard_labels (10)
U$16 U$17 U$23 U$25 U$41 U$42 U$49 U$51 U$67 U$68 U$75 U$77 U$93 U$94 U$101 U$103 U$119 U$120 U$127 U$129 U$145 U$146 U$153 U$155 U$171 U$172 U$179 U$181 U$197 U$198 U$205 U$207 U$223 U$224 U$231 U$233 U$249 U$250 U$257 U$259 = buzzard_labels (11)

## Nets
3.3V: C1.1 C2.1 C3.1 C4.1 C5.1 C6.1 C7.1 C8.1 C9.1 D2.A J1.2 J2.2 J8.2 J9.2 J10.2 J23.2 J24.2 J25.2 J26.2 JP1.2 JP2.2 JP3.2 JP4.2 R1.1 R2.1 R3.1 R6.1 R7.1 R8.1 R9.1 R10.1 R11.1 R12.1 R13.1 R14.1 R15.1 R16.1 R17.1 R18.1 R22.2 U2.24
3.3V1: C10.1 C11.1 C12.1 C13.1 C14.1 C15.1 C16.1 C17.1 C18.1 D1.A J3.2 J4.2 J5.2 J6.2 J7.2 J11.2 J12.2 J13.2 J15.2 JP5.2 JP6.2 JP7.2 JP8.2 R26.1 R27.1 R28.1 R29.1 R30.1 R31.1 R32.1 R33.1 R34.1 R35.1 R36.1 R37.1 R38.1 R39.1 R40.1 R41.1 R45.2 U1.24
3.3V2: C19.1 C20.1 C21.1 C22.1 C23.1 C24.1 C25.1 C26.1 C27.1 D3.A J16.2 J17.2 J18.2 J19.2 J20.2 J22.2 J27.2 J28.2 J30.2 JP9.2 JP10.2 JP11.2 JP12.2 R49.1 R50.1 R51.1 R52.1 R53.1 R54.1 R55.1 R56.1 R57.1 R58.1 R59.1 R60.1 R61.1 R62.1 R63.1 R64.1 R68.2 U3.24
3.3V3: C28.1 C29.1 C30.1 C31.1 C32.1 C33.1 C34.1 C35.1 C36.1 D4.A J31.2 J32.2 J33.2 J34.2 J35.2 J36.2 J37.2 J38.2 J40.2 JP13.2 JP14.2 JP15.2 JP16.2 R72.1 R73.1 R74.1 R75.1 R76.1 R77.1 R78.1 R79.1 R80.1 R81.1 R82.1 R83.1 R84.1 R85.1 R86.1 R87.1 R91.2 U4.24
3.3V4: C37.1 C38.1 C39.1 C40.1 C41.1 C42.1 C43.1 C44.1 C45.1 D5.A J41.2 J42.2 J43.2 J44.2 J45.2 J46.2 J47.2 J48.2 J50.2 JP17.2 JP18.2 JP19.2 JP20.2 R95.1 R96.1 R97.1 R98.1 R99.1 R100.1 R101.1 R102.1 R103.1 R104.1 R105.1 R106.1 R107.1 R108.1 R109.1 R110.1 R114.2 U5.24
3.3V5: C46.1 C47.1 C48.1 C49.1 C50.1 C51.1 C52.1 C53.1 C54.1 D6.A J51.2 J52.2 J53.2 J54.2 J55.2 J56.2 J57.2 J58.2 J60.2 JP21.2 JP22.2 JP23.2 JP24.2 R118.1 R119.1 R120.1 R121.1 R122.1 R123.1 R124.1 R125.1 R126.1 R127.1 R128.1 R129.1 R130.1 R131.1 R132.1 R133.1 R137.2 U6.24
3.3V6: C55.1 C56.1 C57.1 C58.1 C59.1 C60.1 C61.1 C62.1 C63.1 D7.A J61.2 J62.2 J63.2 J64.2 J65.2 J66.2 J67.2 J68.2 J70.2 JP25.2 JP26.2 JP27.2 JP28.2 R141.1 R142.1 R143.1 R144.1 R145.1 R146.1 R147.1 R148.1 R149.1 R150.1 R151.1 R152.1 R153.1 R154.1 R155.1 R156.1 R160.2 U7.24
3.3V7: C64.1 C65.1 C66.1 C67.1 C68.1 C69.1 C70.1 C71.1 C72.1 D8.A J71.2 J72.2 J73.2 J74.2 J75.2 J76.2 J77.2 J78.2 J80.2 JP29.2 JP30.2 JP31.2 JP32.2 R164.1 R165.1 R166.1 R167.1 R168.1 R169.1 R170.1 R171.1 R172.1 R173.1 R174.1 R175.1 R176.1 R177.1 R178.1 R179.1 R183.2 U8.24
3.3V8: C73.1 C74.1 C75.1 C76.1 C77.1 C78.1 C79.1 C80.1 C81.1 D9.A J81.2 J82.2 J83.2 J84.2 J85.2 J86.2 J87.2 J88.2 J90.2 JP33.2 JP34.2 JP35.2 JP36.2 R187.1 R188.1 R189.1 R190.1 R191.1 R192.1 R193.1 R194.1 R195.1 R196.1 R197.1 R198.1 R199.1 R200.1 R201.1 R202.1 R206.2 U9.24
3.3V9: C82.1 C83.1 C84.1 C85.1 C86.1 C87.1 C88.1 C89.1 C90.1 D10.A J91.2 J92.2 J93.2 J94.2 J95.2 J96.2 J97.2 J98.2 J100.2 JP37.2 JP38.2 JP39.2 JP40.2 R210.1 R211.1 R212.1 R213.1 R214.1 R215.1 R216.1 R217.1 R218.1 R219.1 R220.1 R221.1 R222.1 R223.1 R224.1 R225.1 R229.2 U10.24
!RST: J21.1 R22.1 U2.3
!RST1: J14.1 R45.1 U1.3
!RST2: J29.1 R68.1 U3.3
!RST3: J39.1 R91.1 U4.3
!RST4: J49.1 R114.1 U5.3
!RST5: J59.1 R137.1 U6.3
!RST6: J69.1 R160.1 U7.3
!RST7: J79.1 R183.1 U8.3
!RST8: J89.1 R206.1 U9.3
!RST9: J99.1 R229.1 U10.3
ADR0: JP3.1 R19.2 U2.1
ADR1: JP2.1 R20.2 U2.2
ADR2: JP1.1 R21.2 U2.21
ADR3: JP6.1 R43.2 U1.2
ADR4: JP7.1 R42.2 U1.1
ADR5: JP5.1 R44.2 U1.21
ADR6: JP10.1 R66.2 U3.2
ADR7: JP11.1 R65.2 U3.1
ADR8: JP9.1 R67.2 U3.21
ADR9: JP14.1 R89.2 U4.2
ADR10: JP15.1 R88.2 U4.1
ADR11: JP13.1 R90.2 U4.21
ADR12: JP18.1 R112.2 U5.2
ADR13: JP19.1 R111.2 U5.1
ADR14: JP17.1 R113.2 U5.21
ADR15: JP22.1 R135.2 U6.2
ADR16: JP23.1 R134.2 U6.1
ADR17: JP21.1 R136.2 U6.21
ADR18: JP26.1 R158.2 U7.2
ADR19: JP27.1 R157.2 U7.1
ADR20: JP25.1 R159.2 U7.21
ADR21: JP30.1 R181.2 U8.2
ADR22: JP31.1 R180.2 U8.1
ADR23: JP29.1 R182.2 U8.21
ADR24: JP34.1 R204.2 U9.2
ADR25: JP35.1 R203.2 U9.1
ADR26: JP33.1 R205.2 U9.21
ADR27: JP38.1 R227.2 U10.2
ADR28: JP39.1 R226.2 U10.1
ADR29: JP37.1 R228.2 U10.21
GND [vcc]: C1.2 C2.2 C3.2 C4.2 C5.2 C6.2 C7.2 C8.2 C9.2 J1.1 J2.1 J8.1 J9.1 J10.1 J23.1 J24.1 J25.1 J26.1 R19.1 R20.1 R21.1 R24.1 U2.12
GND1 [vcc]: C10.2 C11.2 C12.2 C13.2 C14.2 C15.2 C16.2 C17.2 C18.2 J3.1 J4.1 J5.1 J6.1 J7.1 J11.1 J12.1 J13.1 J15.1 R42.1 R43.1 R44.1 R46.1 U1.12
GND2 [vcc]: C19.2 C20.2 C21.2 C22.2 C23.2 C24.2 C25.2 C26.2 C27.2 J16.1 J17.1 J18.1 J19.1 J20.1 J22.1 J27.1 J28.1 J30.1 R65.1 R66.1 R67.1 R69.1 U3.12
GND3 [vcc]: C28.2 C29.2 C30.2 C31.2 C32.2 C33.2 C34.2 C35.2 C36.2 J31.1 J32.1 J33.1 J34.1 J35.1 J36.1 J37.1 J38.1 J40.1 R88.1 R89.1 R90.1 R92.1 U4.12
GND4 [vcc]: C37.2 C38.2 C39.2 C40.2 C41.2 C42.2 C43.2 C44.2 C45.2 J41.1 J42.1 J43.1 J44.1 J45.1 J46.1 J47.1 J48.1 J50.1 R111.1 R112.1 R113.1 R115.1 U5.12
GND5 [vcc]: C46.2 C47.2 C48.2 C49.2 C50.2 C51.2 C52.2 C53.2 C54.2 J51.1 J52.1 J53.1 J54.1 J55.1 J56.1 J57.1 J58.1 J60.1 R134.1 R135.1 R136.1 R138.1 U6.12
GND6 [vcc]: C55.2 C56.2 C57.2 C58.2 C59.2 C60.2 C61.2 C62.2 C63.2 J61.1 J62.1 J63.1 J64.1 J65.1 J66.1 J67.1 J68.1 J70.1 R157.1 R158.1 R159.1 R161.1 U7.12
GND7 [vcc]: C64.2 C65.2 C66.2 C67.2 C68.2 C69.2 C70.2 C71.2 C72.2 J71.1 J72.1 J73.1 J74.1 J75.1 J76.1 J77.1 J78.1 J80.1 R180.1 R181.1 R182.1 R184.1 U8.12
GND8 [vcc]: C73.2 C74.2 C75.2 C76.2 C77.2 C78.2 C79.2 C80.2 C81.2 J81.1 J82.1 J83.1 J84.1 J85.1 J86.1 J87.1 J88.1 J90.1 R203.1 R204.1 R205.1 R207.1 U9.12
GND9 [vcc]: C82.2 C83.2 C84.2 C85.2 C86.2 C87.2 C88.2 C89.2 C90.2 J91.1 J92.1 J93.1 J94.1 J95.1 J96.1 J97.1 J98.1 J100.1 R226.1 R227.1 R228.1 R230.1 U10.12
MAIN_SCL: J2.4 R5.2 U2.22
MAIN_SCL1: J15.4 R25.2 U1.22
MAIN_SCL2: J30.4 R48.2 U3.22
MAIN_SCL3: J40.4 R71.2 U4.22
MAIN_SCL4: J50.4 R94.2 U5.22
MAIN_SCL5: J60.4 R117.2 U6.22
MAIN_SCL6: J70.4 R140.2 U7.22
MAIN_SCL7: J80.4 R163.2 U8.22
MAIN_SCL8: J90.4 R186.2 U9.22
MAIN_SCL9: J100.4 R209.2 U10.22
MAIN_SDA: J2.3 R4.2 U2.23
MAIN_SDA1: J15.3 R23.2 U1.23
MAIN_SDA2: J30.3 R47.2 U3.23
MAIN_SDA3: J40.3 R70.2 U4.23
MAIN_SDA4: J50.3 R93.2 U5.23
MAIN_SDA5: J60.3 R116.2 U6.23
MAIN_SDA6: J70.3 R139.2 U7.23
MAIN_SDA7: J80.3 R162.2 U8.23
MAIN_SDA8: J90.3 R185.2 U9.23
MAIN_SDA9: J100.3 R208.2 U10.23
N$1: D2.C R24.2
N$2: JP4.3 R4.1
N$3: JP4.1 R5.1
N$4: D1.C R46.2
N$5: JP8.3 R23.1
N$6: JP8.1 R25.1
N$7: D3.C R69.2
N$8: JP12.3 R47.1
N$9: JP12.1 R48.1
N$10: D4.C R92.2
N$11: JP16.3 R70.1
N$12: JP16.1 R71.1
N$13: D5.C R115.2
N$14: JP20.3 R93.1
N$15: JP20.1 R94.1
N$16: D6.C R138.2
N$17: JP24.3 R116.1
N$18: JP24.1 R117.1
N$19: D7.C R161.2
N$20: JP28.3 R139.1
N$21: JP28.1 R140.1
N$22: D8.C R184.2
N$23: JP32.3 R162.1
N$24: JP32.1 R163.1
N$25: D9.C R207.2
N$26: JP36.3 R185.1
N$27: JP36.1 R186.1
N$28: D10.C R230.2
N$29: JP40.3 R208.1
N$30: JP40.1 R209.1
SCL0: J1.4 R7.2 U2.5
SCL1: J8.4 R8.2 U2.7
SCL2: J9.4 R10.2 U2.9
SCL3: J10.4 R12.2 U2.11
SCL4: J23.4 R3.2 U2.14
SCL5: J24.4 R14.2 U2.16
SCL6: J25.4 R16.2 U2.18
SCL7: J26.4 R18.2 U2.20
SCL8: J3.4 R27.2 U1.5
SCL9: J4.4 R29.2 U1.7
SCL10: J6.4 R33.2 U1.11
SCL11: J7.4 R35.2 U1.14
SCL12: J11.4 R37.2 U1.16
SCL13: J12.4 R39.2 U1.18
SCL14: J13.4 R41.2 U1.20
SCL15: J5.4 R31.2 U1.9
SCL16: J16.4 R50.2 U3.5
SCL17: J17.4 R52.2 U3.7
SCL18: J19.4 R56.2 U3.11
SCL19: J20.4 R58.2 U3.14
SCL20: J22.4 R60.2 U3.16
SCL21: J27.4 R62.2 U3.18
SCL22: J28.4 R64.2 U3.20
SCL23: J18.4 R54.2 U3.9
SCL24: J31.4 R73.2 U4.5
SCL25: J32.4 R75.2 U4.7
SCL26: J34.4 R79.2 U4.11
SCL27: J35.4 R81.2 U4.14
SCL28: J36.4 R83.2 U4.16
SCL29: J37.4 R85.2 U4.18
SCL30: J38.4 R87.2 U4.20
SCL31: J33.4 R77.2 U4.9
SCL32: J41.4 R96.2 U5.5
SCL33: J42.4 R98.2 U5.7
SCL34: J44.4 R102.2 U5.11
SCL35: J45.4 R104.2 U5.14
SCL36: J46.4 R106.2 U5.16
SCL37: J47.4 R108.2 U5.18
SCL38: J48.4 R110.2 U5.20
SCL39: J43.4 R100.2 U5.9
SCL40: J51.4 R119.2 U6.5
SCL41: J52.4 R121.2 U6.7
SCL42: J54.4 R125.2 U6.11
SCL43: J55.4 R127.2 U6.14
SCL44: J56.4 R129.2 U6.16
SCL45: J57.4 R131.2 U6.18
SCL46: J58.4 R133.2 U6.20
SCL47: J53.4 R123.2 U6.9
SCL48: J61.4 R142.2 U7.5
SCL49: J62.4 R144.2 U7.7
SCL50: J64.4 R148.2 U7.11
SCL51: J65.4 R150.2 U7.14
SCL52: J66.4 R152.2 U7.16
SCL53: J67.4 R154.2 U7.18
SCL54: J68.4 R156.2 U7.20
SCL55: J63.4 R146.2 U7.9
SCL56: J71.4 R165.2 U8.5
SCL57: J72.4 R167.2 U8.7
SCL58: J74.4 R171.2 U8.11
SCL59: J75.4 R173.2 U8.14
SCL60: J76.4 R175.2 U8.16
SCL61: J77.4 R177.2 U8.18
SCL62: J78.4 R179.2 U8.20
SCL63: J73.4 R169.2 U8.9
SCL64: J81.4 R188.2 U9.5
SCL65: J82.4 R190.2 U9.7
SCL66: J84.4 R194.2 U9.11
SCL67: J85.4 R196.2 U9.14
SCL68: J86.4 R198.2 U9.16
SCL69: J87.4 R200.2 U9.18
SCL70: J88.4 R202.2 U9.20
SCL71: J83.4 R192.2 U9.9
SCL72: J91.4 R211.2 U10.5
SCL73: J92.4 R213.2 U10.7
SCL74: J94.4 R217.2 U10.11
SCL75: J95.4 R219.2 U10.14
SCL76: J96.4 R221.2 U10.16
SCL77: J97.4 R223.2 U10.18
SCL78: J98.4 R225.2 U10.20
SCL79: J93.4 R215.2 U10.9
SDA0: J1.3 R6.2 U2.4
SDA1: J8.3 R1.2 U2.6
SDA2: J9.3 R9.2 U2.8
SDA3: J10.3 R11.2 U2.10
SDA4: J23.3 R2.2 U2.13
SDA5: J24.3 R13.2 U2.15
SDA6: J25.3 R15.2 U2.17
SDA7: J26.3 R17.2 U2.19
SDA8: J3.3 R26.2 U1.4
SDA9: J4.3 R28.2 U1.6
SDA10: J6.3 R32.2 U1.10
SDA11: J7.3 R34.2 U1.13
SDA12: J11.3 R36.2 U1.15
SDA13: J13.3 R40.2 U1.19
SDA14: J12.3 R38.2 U1.17
SDA15: J5.3 R30.2 U1.8
SDA16: J16.3 R49.2 U3.4
SDA17: J17.3 R51.2 U3.6
SDA18: J19.3 R55.2 U3.10
SDA19: J20.3 R57.2 U3.13
SDA20: J22.3 R59.2 U3.15
SDA21: J28.3 R63.2 U3.19
SDA22: J27.3 R61.2 U3.17
SDA23: J18.3 R53.2 U3.8
SDA24: J31.3 R72.2 U4.4
SDA25: J32.3 R74.2 U4.6
SDA26: J34.3 R78.2 U4.10
SDA27: J35.3 R80.2 U4.13
SDA28: J36.3 R82.2 U4.15
SDA29: J38.3 R86.2 U4.19
SDA30: J37.3 R84.2 U4.17
SDA31: J33.3 R76.2 U4.8
SDA32: J41.3 R95.2 U5.4
SDA33: J42.3 R97.2 U5.6
SDA34: J44.3 R101.2 U5.10
SDA35: J45.3 R103.2 U5.13
SDA36: J46.3 R105.2 U5.15
SDA37: J48.3 R109.2 U5.19
SDA38: J47.3 R107.2 U5.17
SDA39: J43.3 R99.2 U5.8
SDA40: J51.3 R118.2 U6.4
SDA41: J52.3 R120.2 U6.6
SDA42: J54.3 R124.2 U6.10
SDA43: J55.3 R126.2 U6.13
SDA44: J56.3 R128.2 U6.15
SDA45: J58.3 R132.2 U6.19
SDA46: J57.3 R130.2 U6.17
SDA47: J53.3 R122.2 U6.8
SDA48: J61.3 R141.2 U7.4
SDA49: J62.3 R143.2 U7.6
SDA50: J64.3 R147.2 U7.10
SDA51: J65.3 R149.2 U7.13
SDA52: J66.3 R151.2 U7.15
SDA53: J68.3 R155.2 U7.19
SDA54: J67.3 R153.2 U7.17
SDA55: J63.3 R145.2 U7.8
SDA56: J71.3 R164.2 U8.4
SDA57: J72.3 R166.2 U8.6
SDA58: J74.3 R170.2 U8.10
SDA59: J75.3 R172.2 U8.13
SDA60: J76.3 R174.2 U8.15
SDA61: J78.3 R178.2 U8.19
SDA62: J77.3 R176.2 U8.17
SDA63: J73.3 R168.2 U8.8
SDA64: J81.3 R187.2 U9.4
SDA65: J82.3 R189.2 U9.6
SDA66: J84.3 R193.2 U9.10
SDA67: J85.3 R195.2 U9.13
SDA68: J86.3 R197.2 U9.15
SDA69: J88.3 R201.2 U9.19
SDA70: J87.3 R199.2 U9.17
SDA71: J83.3 R191.2 U9.8
SDA72: J91.3 R210.2 U10.4
SDA73: J92.3 R212.2 U10.6
SDA74: J94.3 R216.2 U10.10
SDA75: J95.3 R218.2 U10.13
SDA76: J96.3 R220.2 U10.15
SDA77: J98.3 R224.2 U10.19
SDA78: J97.3 R222.2 U10.17
SDA79: J93.3 R214.2 U10.8

## Tracks (layer width: path | path; a pad name or v marks a point on that pad's centre or on a via)
3.3V  (via drill 0.38)
  Top 0.178: 23.33,37.76 23.37,37.72 23.37,37.34 | C3.1 R8.1 | R22.2 16.98,42.84 v16.89,42.93 16.85,42.97 | R1.1 16.85,39.28 16.51,39.62 14.22,39.62 13.46,38.86 13.46,38.35 12.95,37.85 J8.2 | 23.45,39.46 23.37,39.37 | 23.37,37.34 | 38.61,44.96 32.64,44.96 32.42,45.17 C9.1 | 38.61,34.8 32.77,34.8 32.42,35.14 C8.1 | 38.61,46.23 38.61,46.61 | J25.2 | R18.1 R17.1 C9.1 | R16.1 R15.1 C8.1 | 32.42,15.75 R2.1 R3.1 | J24.2 | 38.61,24.64 32.77,24.64 32.42,24.98 C7.1 R13.1 | C5.1 R12.1 R11.1 16.85,19.65 v17.02,19.81 | J26.2 | J10.2 | R9.1 R10.1 C4.1 16.85,24.55 v17.02,24.38 17.02,24 16.38,23.37 10.03,23.37 | R14.1 R13.1 | R13.1 | 32.42,15.75 | 32.42,15.75 C6.1 32.42,14.82 32.77,14.48 38.61,14.48 | JP4.2 25.91,42.42 | C8.1 | C9.1
  Top 0.254: R1.1 R8.1